# EAGLE board Servo (EAGLE 8.3.2)
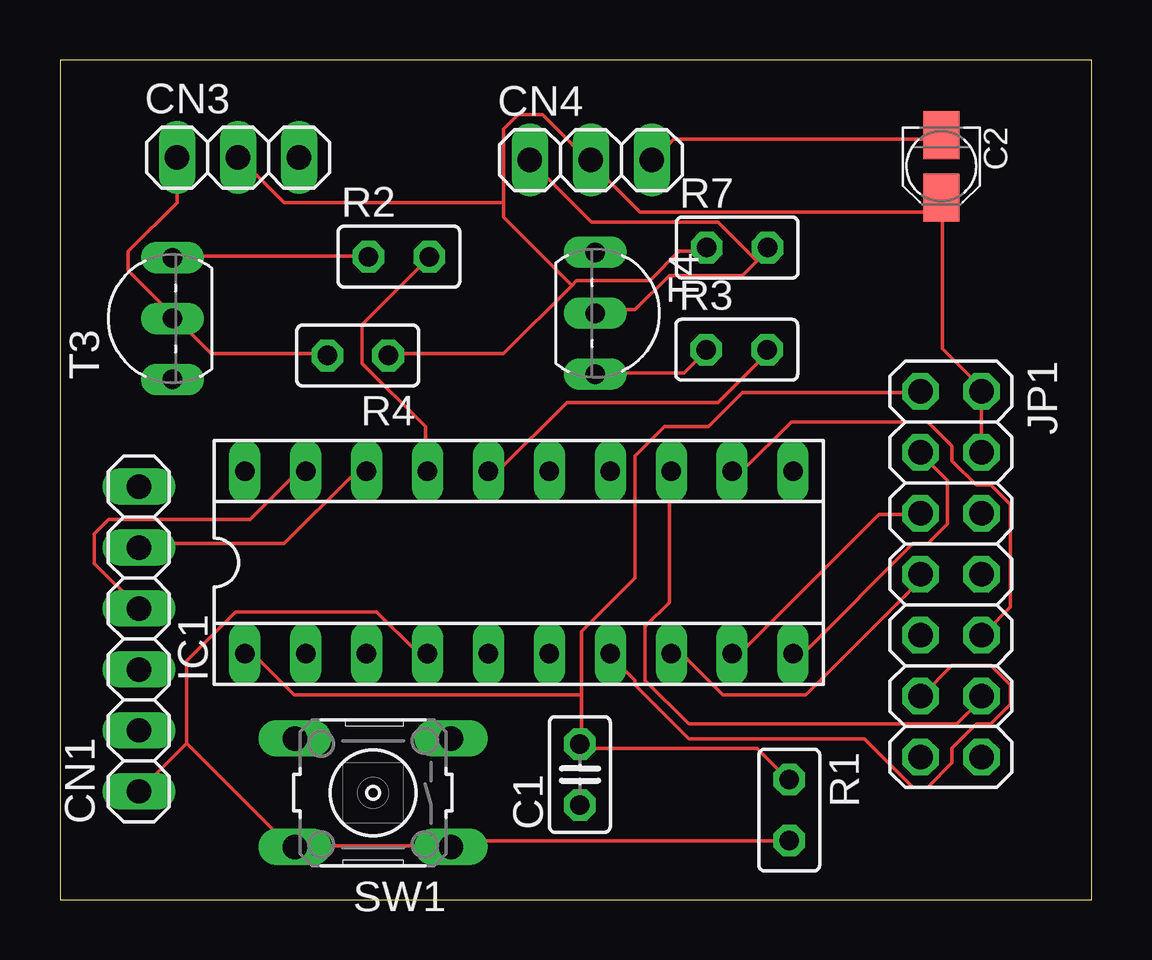
[diagram p0: board, top side]
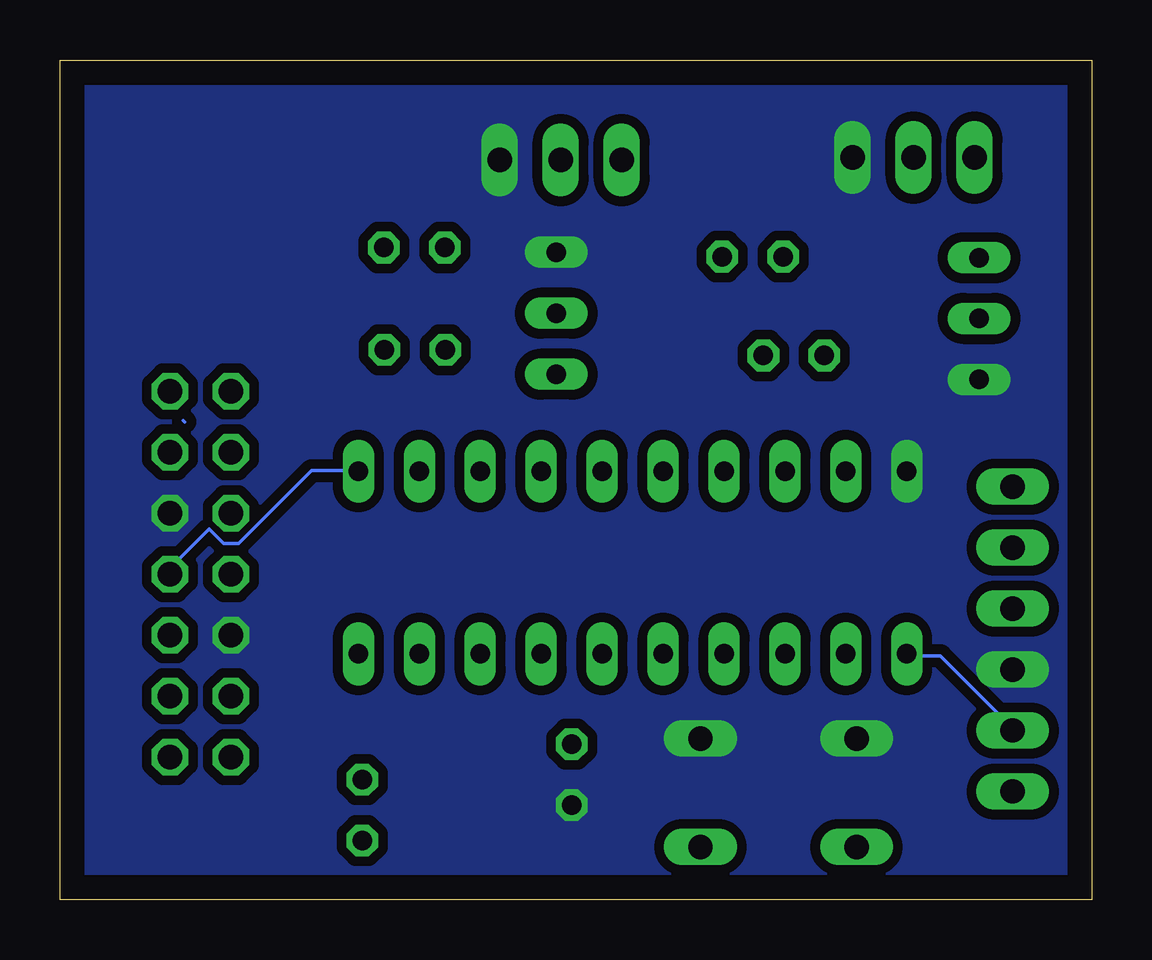
[diagram p1: board, bottom side, seen from below]

Size 43 x 35 mm. Coordinates in mm from the lower left corner, seen from the top.
Outline: 0,0 43,0 43,35 0,35 0,0
Copper layers (1*16): Top 0.035mm / dielectric 1.5mm / Bottom 0.035mm
Design rules "default *": minimum track width 6mil, minimum drill 0.35mm, track to track 10mil, track to pad 10mil, pad to pad 10mil, via to via 10mil, smd to smd 8mil, copper to edge 40mil, drill to drill 6mil, minimum pad ring 10mil, minimum via ring 8mil, stop-mask expansion 4mil, vias tented up to drill 0mil, thermal gap 10mil

## Footprints (pad centres in the part's own frame; a part is rotated, then mirrored left to right if it is on the bottom)
C025-025X050 = drill 0.813 octagon: 1 -1.27,0; 2 1.27,0
PANASONIC_A = smd 2 x 1.5: + 1.3,0; - -1.3,0
1X06 = drill 1.016 long: 1 -6.35,0; 2 -3.81,0; 3 -1.27,0; 4 1.27,0; 5 3.81,0; 6 6.35,0
1X03 = drill 1.016 long: 1 -2.54,0; 2 0,0; 3 2.54,0
SOCKET-20 = drill 0.813 long: 1 -11.43,-3.81; 2 -8.89,-3.81; 3 -6.35,-3.81; 4 -3.81,-3.81; 5 -1.27,-3.81; 6 1.27,-3.81; 7 3.81,-3.81; 8 6.35,-3.81; 9 8.89,-3.81; 10 11.43,-3.81; 11 11.43,3.81; 12 8.89,3.81; 13 6.35,3.81; 14 3.81,3.81; 15 1.27,3.81; 16 -1.27,3.81; 17 -3.81,3.81; 18 -6.35,3.81; 19 -8.89,3.81; 20 -11.43,3.81
2X07 = drill 1.016 octagon: 1 -7.62,-1.27; 2 -7.62,1.27; 3 -5.08,-1.27; 4 -5.08,1.27; 5 -2.54,-1.27; 6 -2.54,1.27; 7 0,-1.27; 8 0,1.27; 9 2.54,-1.27; 10 2.54,1.27; 11 5.08,-1.27; 12 5.08,1.27; 13 7.62,-1.27; 14 7.62,1.27
V526-0 = drill 0.813 octagon: 1 -1.27,0; 2 1.27,0
B3F-10XX = drill 1.016 long: 1 -3.251,2.261; 2 3.251,2.261; 3 -3.251,-2.261; 4 3.251,-2.261
TO92-ECB = drill 0.813 long: B 2.54,0; C 0,0; E -2.54,0

## Placement (x,y rotation side)
C1  4.7uF  [C025-025X050]  21.67,5.21 90 top
C2  100uF  [PANASONIC_A]  36.74,30.57 270 top
CN1  ICSP  [1X06]  3.29,10.86 90 top
CN3  Servo1  [1X03]  7.42,30.93 0 top
CN4  Servo2  [1X03]  22.13,30.83 0 top
IC1  PIC16F1508  [SOCKET-20]  19.13,14.05 0 top
JP1  Raspi  [2X07]  37.14,13.56 270 top
R1  10k  [V526-0]  30.4,3.73 270 top
R2  3.3k  [V526-0]  14.13,26.8 0 top
R3  3.3k  [V526-0]  28.21,22.92 0 top
R4  5.1k  [V526-0]  12.41,22.68 180 top
R7  5.1k  [V526-0]  28.23,27.18 0 top
SW1  Reset  [B3F-10XX]  13.05,4.45 180 top
T3  2SC1815  [TO92-ECB]  4.69,24.22 90 top
T4  2SC1815  [TO92-ECB]  22.31,24.44 270 top

## Library data of the parts
C1 C2 R1-R4 R7 = rcl
CN1 CN3 CN4 JP1 = pinhead
IC1 = ic-package
SW1 = switch-omron; MPN: B3F-1000; OC_FARNELL: 176432; OC_NEWARK: 36M3542
T3 T4 = transistor

## Nets
GND1: C1.1 C2.- CN1.3 CN3.3 CN4.3 IC1.20 JP1.6 JP1.9 SW1.3 SW1.4 T3.E T4.E
N$1: IC1.10 JP1.3
N$2: IC1.9 JP1.5
N$3: IC1.8 JP1.7
N$4: CN4.1 R7.2 T4.C
N$5: IC1.7 JP1.11
N$6: IC1.11 JP1.8
N$7: IC1.12 JP1.10
N$8: CN1.1 IC1.4 R1.2 SW1.1 SW1.2
N$9: IC1.13 JP1.12
N$11: IC1.17 R2.2
N$12: IC1.16 R3.2
N$13: R2.1 T3.B
N$14: R3.1 T4.B
N$15: CN3.1 R4.2 T3.C
N$19: CN1.4 IC1.19
N$20: CN1.5 IC1.18
VCC: C2.+ CN3.2 CN4.2 JP1.2 JP1.4 R4.1 R7.1
VDD: C1.2 CN1.2 IC1.1 JP1.1 R1.1

## Tracks (layer width: path | path; a pad name or v marks a point on that pad's centre or on a via)
GND1
  Top 0.152: C2.- 36.58,31.7 25.6,31.7 24.79,30.89 CN4.3
  pour Bottom (isolate 0.406, no thermals): 0,35 0,0 43,0 43,35
N$1
  Top 0.152: IC1.10 30.68,10.36 31.09,10.36 35.56,14.83 36.17,14.83 36.98,15.65 36.98,17.48 35.97,18.49 JP1.3
N$2
  Top 0.152: IC1.9 28.04,10.36 28.45,10.36 34.14,16.05 35.76,16.05 JP1.5
N$3
  Top 0.152: IC1.8 25.6,10.16 26.01,10.16 27.64,8.53 31.09,8.53 35.97,13.41 JP1.7
N$4
  Top 0.152: 29.06,26.62 29.46,27.03 R7.2 | 29.06,26.62 28.45,26.01 25.4,26.01 23.98,24.59 22.35,24.59 T4.C | 29.06,26.62 27.43,28.25 22.15,28.25 19.71,30.68 CN4.1
N$5
  Top 0.152: IC1.7 22.96,10.16 23.98,9.14 23.98,8.94 26.21,6.71 33.53,6.71 35.56,4.67 36.17,4.67 37.19,5.69 37.19,6.3 38.2,7.32 38.81,7.32 39.62,8.13 39.62,8.94 38.81,9.75 37.19,9.75 35.97,8.53 JP1.11
N$6
  Bottom 0.152: IC1.11 30.68,17.88 32.51,17.88 35.56,14.83 36.17,14.83 36.78,15.44 38.61,13.61 JP1.8
N$7
  Top 0.152: IC1.12 28.04,17.88 28.45,17.88 30.48,19.91 36.17,19.91 37.19,18.9 37.19,18.29 38.2,17.27 38.81,17.27 39.62,16.46 39.62,12.19 38.61,11.18 JP1.10
N$8
  Top 0.152: 5.28,6.5 5.28,9.96 7.32,11.99 13.21,11.99 14.83,10.36 15.24,10.36 IC1.4 | 5.28,6.5 3.45,4.67 CN1.1 | R1.2 30.28,2.44 16.66,2.44 16.46,2.23 SW1.1 16.26,2.23 9.96,2.23 SW1.2 9.75,2.03 5.28,6.5
N$9
  Top 0.152: IC1.13 25.4,17.68 25.4,12.39 24.38,11.38 24.38,9.14 26.21,7.32 37.39,7.32 38.41,8.33 JP1.12
N$10
  Bottom 0.152: 37.8,19.91 37.86,19.97
N$11
  Top 0.152: IC1.17 15.24,17.88 15.24,19.71 12.6,22.35 12.6,23.98 15.24,26.62 R2.2
N$12
  Top 0.152: IC1.16 17.88,17.88 18.29,17.88 21.13,20.73 27.43,20.73 29.46,22.76 R3.2
N$13
  Top 0.152: T3.B 4.88,26.82 12.8,26.82 R2.1
N$14
  Top 0.152: T4.B 22.35,21.95 26.01,21.95 26.82,22.76 R3.1
N$15
  Top 0.152: R4.2 10.97,22.76 6.3,22.76 4.88,24.18 T3.C 4.67,24.38 2.85,26.21 2.85,27.03 4.88,29.06 4.88,30.89 CN3.1
N$19
  Top 0.152: IC1.19 10.16,17.68 9.75,17.68 7.92,15.85 2.03,15.85 1.42,15.24 1.42,14.02 3.25,12.19 CN1.4
N$20
  Top 0.152: IC1.18 12.6,17.68 12.19,17.68 9.35,14.83 3.45,14.83 CN1.5
VCC
  Top 0.152: 36.78,28.65 36.78,22.96 38.41,21.34 JP1.2 38.41,21.13 38.41,18.69 JP1.4 | 36.78,28.65 36.78,29.26 C2.+ 36.78,28.65 | 21.34,25.6 21.54,25.81 24.59,25.81 25.81,27.03 26.82,27.03 R7.1 | 21.34,25.6 18.49,22.76 13.82,22.76 R4.1 | 18.49,29.06 18.49,28.45 21.34,25.6 | 18.49,29.06 18.49,32.11 19.1,32.72 20.12,32.72 21.95,30.89 CN4.2 22.15,30.68 24.18,28.65 36.78,28.65 | 18.49,29.06 9.35,29.06 7.52,30.89 CN3.2
VDD
  Top 0.152: R1.1 30.28,5.08 29.06,6.3 21.74,6.3 C1.2 21.74,6.5 21.74,8.53 | 21.74,8.53 21.74,11.18 23.98,13.41 23.98,18.49 25.2,19.71 27.03,19.71 28.45,21.13 35.76,21.13 JP1.1 | 21.74,8.53 9.75,8.53 8.13,10.16 7.72,10.16 IC1.1
  Bottom 0.152: IC1.1 7.52,10.16 6.3,10.16 3.25,7.11 CN1.2